# Altium PCB MS20_PCB.PcbDoc
Units mm, origin at the board's own origin, x right, y up, seen from the top; angles counter-clockwise.
Board outline 40 x 100 mm, 2 copper layers (Top Layer, Bottom Layer), stack 1.571 mm thick; 53 components, 34 nets, 160 pads, 38 vias.
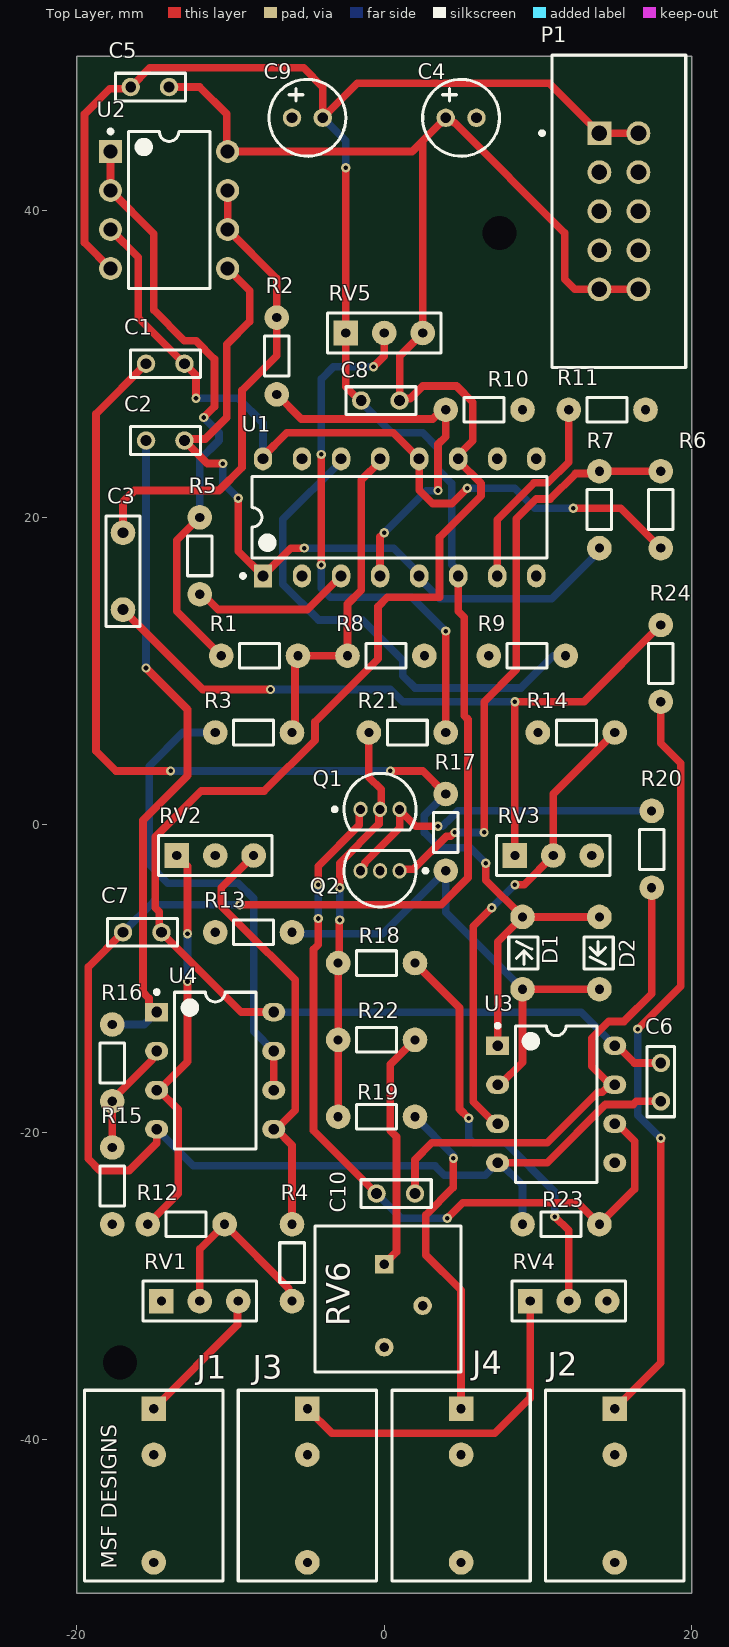
[diagram p0: Top Layer view]
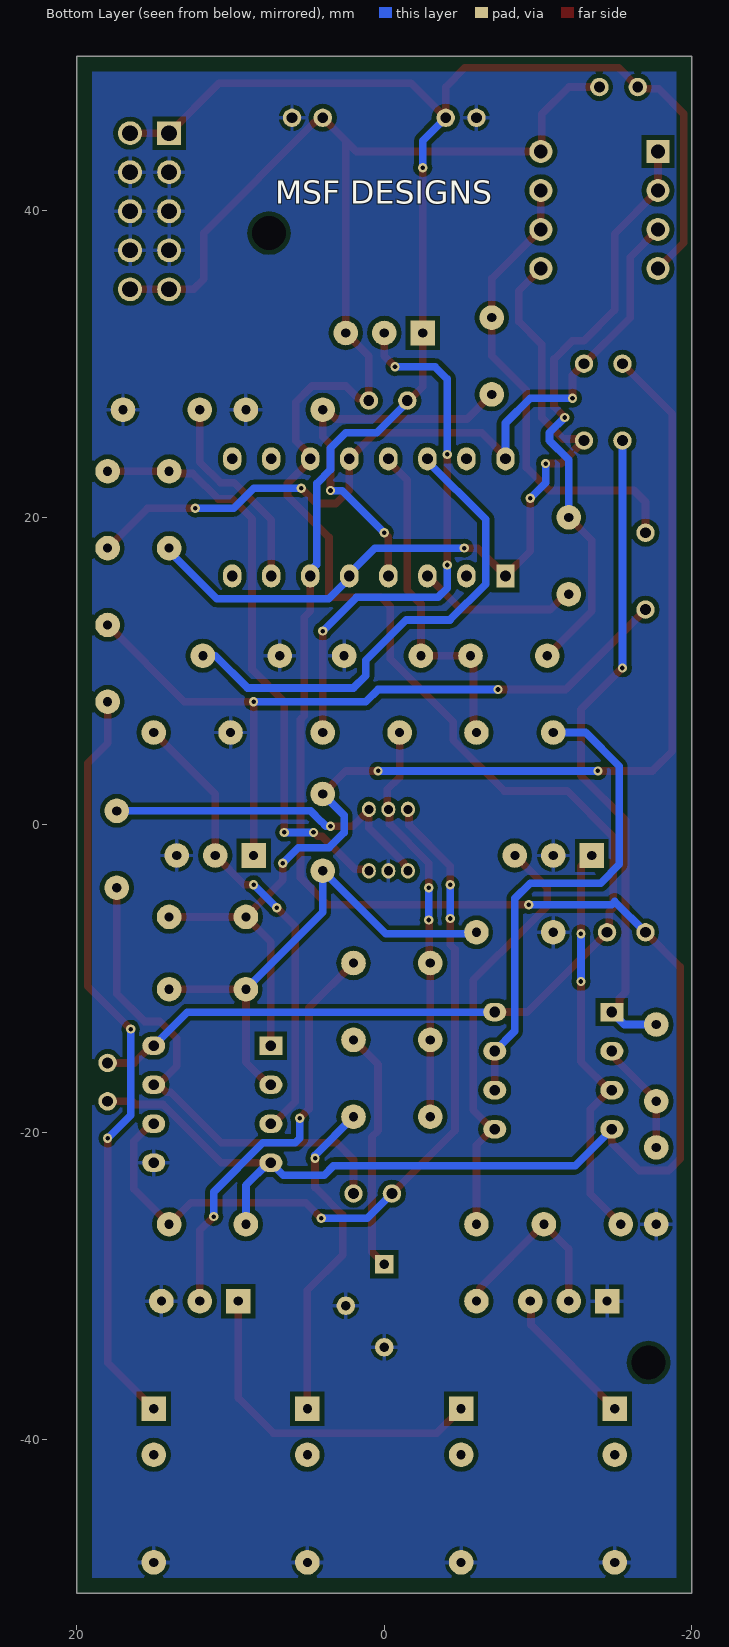
[diagram p1: Bottom Layer view, seen from below]

## Layer stack, top to bottom
Top Solder: solder mask 0.0102, Solder Resist, Dk 3.5
Top Layer: signal copper 0.0356
Dielectric 1: dielectric 1.5, FR-4, Dk 4.8
Bottom Layer: signal copper 0.0356
Bottom Solder: solder mask 0.0102, Solder Resist, Dk 3.5

## Board outline
-20,-50 -20,50 20,50 20,-50

## Design rules (kind name [scope] priority, off if disabled: settings)
Clearance [All] p1: gap=0.3 ignorepadtopadclearanceinfootprint=FALSE
PolygonConnect [All] p1: connectstyle=Relief reliefconductorwidth=0.254 reliefentries=4 polygonreliefangle="90 Angle" airgapwidth=0.254
RoutingVias [All] p1: holewidth=0.3 width=0.6 viastyle="Through Hole" minholewidth=0.3 minwidth=0.6 maxholewidth=0.3 maxwidth=0.6
SilkToSilkClearance [All] p1 off: silktosilkclearance=0.254
SolderMaskExpansion [All] p1: expansion=0.102 istentingtop=FALSE
Width [All] p1: maxlimit=1 minlimit=0.3 preferedwidth=0.5
29 further rules are at their usual default settings.

## Components (designator, comment, footprint, x,y, rotation, side; value= is the part's Value field where it differs from the comment)
C1 "Cap" CERAMIC_CAP -13,30 r180 top value=1n
C2 "Cap" CERAMIC_CAP -13,25 r180 top value=1n
C3 "Cap" FILM_CAPACITOR -17,19 r270 top value=470n
C4 "Cap Pol1" ELECTROLYTIC_CAP 4,46 r0 top value=10u
C5 "Cap" CERAMIC_CAP -14,48 r180 top value=100n
C6 "Cap" CERAMIC_CAP 18,-15.5 r270 top value=100n
C7 "Cap" CERAMIC_CAP -14.5,-7 r180 top value=100n
C8 "Cap" CERAMIC_CAP 1,27.6 r180 top value=100n
C9 "Cap Pol1" ELECTROLYTIC_CAP -6,46 r0 top value=10u
C10 "Cap" CERAMIC_CAP 2,-24 r180 top value=4.7n
D1 "LED0" LED 9,-10.7 r90 top
D2 "LED0" LED 14,-6 r270 top
J1 "Mono Jack" MONO_JACK -15,-38 r0 top
J2 "Mono Jack" MONO_JACK 15,-38 r0 top
J3 "Mono Jack" MONO_JACK -5,-38 r0 top
J4 "Mono Jack" MONO_JACK 5,-38 r0 top
P1 "2X5 HEADER" TECO-1-1634688-0-10_V 15.27,39.92 r270 top
Q1 "BC557C" ONSC-TO-92-3-29-11 -0.27,1 r0 top
Q2 "BC557C" ONSC-TO-92-3-29-11 -0.27,-3 r180 top
R1 "Res1" "RES_AXIAL 5MM" -10.612,11 r0 top value=10K
R2 "Res1" "RES_AXIAL 5MM" -7,33 r270 top value=10K
R3 "Res1" "RES_AXIAL 5MM" -6,6 r180 top value=4.7K
R4 "Res1" "RES_AXIAL 5MM" -6,-31 r90 top value=100K
R5 "Res1" "RES_AXIAL 5MM" -12,15 r90 top value=10K
R6 "Res1" "RES_AXIAL 5MM" 18,23 r270 top value=10K
R7 "Res1" "RES_AXIAL 5MM" 14,23 r270 top value=10K
R8 "Res1" "RES_AXIAL 5MM" 2.612,11 r180 top value=220
R9 "Res1" "RES_AXIAL 5MM" 6.8,11 r0 top value=220
R10 "Res1" "RES_AXIAL 5MM" 9,27 r180 top value=220
R11 "Res1" "RES_AXIAL 5MM" 17,27 r180 top value=220
R12 "Res1" "RES_AXIAL 5MM" -10.388,-26 r180 top value=100K
R13 "Res1" "RES_AXIAL 5MM" -11,-7 r0 top value=4.7K
R14 "Res1" "RES_AXIAL 5MM" 10,6 r0 top value=47K
R15 "Res1" "RES_AXIAL 5MM" -17.7,-26 r90 top value=100K
R16 "Res1" "RES_AXIAL 5MM" -17.7,-18 r90 top value=100K
R17 "Res1" "RES_AXIAL 5MM" 4,-3 r90 top value=10K
R18 "Res1" "RES_AXIAL 5MM" 2,-9 r180 top value=100K
R19 "Res1" "RES_AXIAL 5MM" 2,-19 r180 top value=100K
R20 "Res1" "RES_AXIAL 5MM" 17.4,0.9 r270 top value=4.7K
R21 "Res1" "RES_AXIAL 5MM" 4,6 r180 top value=220K
R22 "Res1" "RES_AXIAL 5MM" 2,-14 r180 top value=1.5K
R23 "Res1" "RES_AXIAL 5MM" 14,-26 r180 top value=470K
R24 "Res1" "RES_AXIAL 5MM" 18,8 r90 top value=1K
RV1 "RPot" RPOT -12,-31 r0 top value=100k
RV2 "RPot" RPOT -11,-2 r0 top value=100k
RV3 "RPot" RPOT 11,-2 r0 top value=100k
RV4 "RPot" RPOT 12,-31 r0 top value=100k
RV5 "RPot" RPOT 0,32 r0 top value=100k
RV6 "RPot SM" TRM_POT 0,-28.6 r0 top
U1 "LM13700N" NFG0016A 1,20 r90 top
U2 "NE5532AP" P0008A#1 -14,40 r0 top
U3 "TL072ACP" P0008A#2 11.19,-18.19 r0 top
U4 "TL072ACP" P0008A#2 -11,-16 r0 top

## Footprints (in the part's own frame and the unit in brackets; to place one, negate y for a bottom-side part, rotate by r counter-clockwise, add the part's x,y. Pads: shape width x height; smd on the part's side, far side on the other; paste and mask are expansions set on the pad)
CERAMIC_CAP [mm]
  round 1.2 hole 0.7: 1(0,0) 2(2.5,0)
  silkscreen extent -1.06,-0.9 3.5,0.9
ELECTROLYTIC_CAP [mm]
  round 1.2 hole 0.7: 1(0,0) 2(2,0)
  silkscreen extent -1.5,-2.5 3.5,2.5
FILM_CAPACITOR [mm]
  round 1.6 / inner round 1.6 / far side round 1.2 hole 0.7: 1(0,0) 2(5,0)
  silkscreen extent -1.1,-1.1 6.1,1.1
LED [mm]
  round 1.6 hole 0.6: 1(0,0) 2(4.7,0)
  silkscreen extent 1.3,-1 3.4,0.9
MONO_JACK [mm]
  rect 1.6x1.6 hole 0.6: 1(0,0)
  round 1.6 hole 0.6: 2(0,-3) 3(0,-10)
  silkscreen extent -4.5,-11.2 4.5,1.2
NFG0016A [mm] "DIP, 16-Leads, Body 19.2x6.6mm, Pitch 2.54mm"
  rect 1.5x1.2 hole 0.7: 1(-3.81,8.89)
  oval 1.5x1.2 hole 0.7: 2(-3.81,6.35) 3(-3.81,3.81) 4(-3.81,1.27) 5(-3.81,-1.27) 6(-3.81,-3.81) 7(-3.81,-6.35) 8(-3.81,-8.89) 9(3.81,-8.89) 10(3.81,-6.35) 11(3.81,-3.81) 12(3.81,-1.27) 13(3.81,1.27) 14(3.81,3.81) 15(3.81,6.35) 16(3.81,8.89)
  silkscreen extent -3.93,-9.6 2.65,10.31, body extent -4.25,-9.52 4.25,9.53, height 4.08
ONSC-TO-92-3-29-11 [mm] "TO, 3-Leads, Body Dia 4.7mm, Pitch 1.27mm"
  oval 0.9x1 hole 0.6: 1(-1.27,0) 2(0,0) 3(1.27,0)
  silkscreen extent -3.07,-1.34 2.35,2.35, body extent -2.35,-1.33 2.36,2.36, height 7.87
P0008A#1 [mm] "DIP, 8-Leads, Body 10.15x6.6mm, Pitch 2.54mm"
  rect 1.5x1.5 hole 0.9: 1(-3.81,3.81)
  round 1.5 hole 0.9: 2(-3.81,1.27) 3(-3.81,-1.27) 4(-3.81,-3.81) 5(3.81,-3.81) 6(3.81,-1.27) 7(3.81,1.27) 8(3.81,3.81)
  silkscreen extent -3.93,-5.1 2.65,5.23, body extent -3.95,-5.07 3.95,5.07, height 5.08
P0008A#2 [mm] "DIP, 8-Leads, Body 10.15x6.6mm, Pitch 2.54mm"
  rect 1.5x1.2 hole 0.7: 1(-3.81,3.81)
  oval 1.5x1.2 hole 0.7: 2(-3.81,1.27) 3(-3.81,-1.27) 4(-3.81,-3.81) 5(3.81,-3.81) 6(3.81,-1.27) 7(3.81,1.27) 8(3.81,3.81)
  silkscreen extent -3.93,-5.1 2.65,5.23, body extent -3.95,-5.07 3.95,5.07, height 5.08
"RES_AXIAL 5MM" [mm]
  round 1.6 hole 0.6: 1(0,0) 2(5,0)
  silkscreen extent 1.2,-0.8 3.8,0.8
RPOT [mm]
  rect 1.6x1.6 hole 0.6: 1(-2.5,0)
  round 1.6 hole 0.6: 2(2.5,0) 3(0,0)
  silkscreen extent -3.7,-1.3 3.7,1.3
TECO-1-1634688-0-10_V [mm] "10-Pin Connector, Body 20.35x8.7mm, Pitch 2.54mm"
  rect 1.55x1.55 hole 1.02: 1(-5.08,-1.27)
  round 1.55 hole 1.02: 2(-5.08,1.27) 3(-2.54,-1.27) 4(-2.54,1.27) 5(0,-1.27) 6(0,1.27) 7(2.54,-1.27) 8(2.54,1.27) 9(5.08,-1.27) 10(5.08,1.27)
  silkscreen extent -10.18,-5.12 10.18,4.35, body extent -10.17,-4.35 10.18,4.65, height 9
TRM_POT [mm]
  round 1.2 hole 0.6: CCW(0,-5.4) W(2.5,-2.7)
  rect 1.2x1.2 hole 0.6: CW(0,0)
  silkscreen extent -4.5,-7 5,2.5

## Part data
C1 C2 C3 C5 C6 C7 C8 C10: "Capacitor", LatestRevisionDate=17-Jul-2002, LatestRevisionNote="Re-released for DXP Platform.", PackageDescription="Radial Cap, Thru-Hole; 2 Leads; 0.3 in Pin Spacing", PackageReference=RAD-0.3, Published=8-Jun-2000, Publisher="Altium Limited"
C4 C9: "Polarized Capacitor (Radial)", LatestRevisionDate=17-Jul-2002, LatestRevisionNote="Re-released for DXP Platform.", PackageDescription="Polarized Capacitor (Radial); 2 Leads", PackageReference=RB7.6-15, Published=8-Jun-2000, Publisher="Altium Limited"
D1 D2: "Typical INFRARED GaAs LED", LatestRevisionDate=08-Jul-2005, LatestRevisionNote="Mech Layer 1 removed.", PackageDescription="LED; 2 Leads", PackageReference=LED-0, Published=8-Jun-2000, Publisher="Altium Limited"
J1 J2 J3 J4: library part 4832.2211, "Phone Connectors Audio Socket 3.5MM 2P SCR", Case/Package=Metal, Current Rating=500mA, Manufacturer=Schurter, Max Operating Temperature=70°C, Max Voltage Rating (AC)=30V, Min Operating Temperature=-20°C, Package Quantity=500, Supplier Part Number 1=486-3418-ND, Body Material=Metal, Category="Audio / Video Connectors", ComponentLink1Description=https://datasheet.ciiva.com/25289/1580985-25289573.pdf?src-supplier=Newark, ComponentLink1URL=https://datasheet.ciiva.com/25289/1580985-25289573.pdf?src-supplier=Newark, ComponentLink2Description=https://datasheet.ciiva.com/12540/typ-4832-2211-58787-12540719.pdf?src-supplier=Mouser, ComponentLink2URL=https://datasheet.ciiva.com/12540/typ-4832-2211-58787-12540719.pdf?src-supplier=Mouser, ComponentLink3Description=https://datasheet.ciiva.com/1086/1580985-1086284.pdf?src-supplier=Element14, ComponentLink3URL=https://datasheet.ciiva.com/1086/1580985-1086284.pdf?src-supplier=Element14, Contact Plating=Silver, Depth=9mm, Diameter=3.5mm, Gender=Female, Length=10.5mm, Manufacturer Part Number=4832.2211, Material=Plastic, Max Current Rating=500mA, Mount="Through Hole,Panel", Number of Contacts=2, Number of Ports=1, Number of Terminals=3, Orientation=Straight, Packaging=Bulk, Pricing 1="1=1.50000, 50=1.38500, 100=1.13400, 500=0.94200, 1000=0.93840 (USD)", REACH SVHC="No SVHC", RoHS=Yes, Shielding=Shielded, Stock 1=363, Supplier 1=Digi-Key, Termination=Solder, Weight=0.077603oz
P1: library part CMP-2000-05854-1, "Male Header, Pitch 2.54 mm, 2 x 5 Postion, Height 9.15 mm, Tail Length 3.2 mm, -40 to 105 degC, RoHS, Bulk", Manufacturer="TE Connectivity", Package Description="10-Pin Connector, Body 20.35 x 8.7 mm, Pitch 2.54 mm", Package Reference=1-1634688-0, Package Version="Rev. C2, 02/2011", Contact Material=Brass, Contact Plating=GoldPlatedContacts, Contact Termination Type=ThroughHole, Datasheet URL=https://datasheet.ciiva.com/6831/eng-cd-1634688-c2-6831201.pdf, Datasheet Version="Rev. C2, 02/2011", Gender=Header, Manufacturer URL=http://www.te.com/, Mounting Technology=ThroughHole, No. of Contacts=10Contacts, No. of Positions=10, No. of Rows=2, Orientation=Straight, Package URL=https://datasheet.ciiva.com/6831/eng-cd-1634688-c2-6831201.pdf, PartNumber=1-1634688-0, Pitch=2.54mm, Pitch Spacing=2.54mm, Product Range=-, SVHC=ToBeAdvised
Q1 Q2: library part CMP-1048-01449-1, "Amplifier Transistor, PNP Silicon, 3-Pin TO-92, Bulk Box", Manufacturer="On Semiconductor", ComponentLink1Description="Manufacturer URL", ComponentLink1URL=http://www.onsemi.com/, ComponentLink2Description=Datasheet, ComponentLink2URL=http://www.onsemi.com/pub_link/Collateral/BC556B-D.PDF, ComponentLink3Description="Package Specification", ComponentLink3URL=http://www.onsemi.cn/pub_link/Collateral/2N6426-D.PDF, DatasheetVersion="Rev. 3", IC Continuous (A)=-0.1, Mounting Technology="Through Hole", PackageDescription="3-Pin Transistor Outline, Body 4.825 x 3.685 mm, Pitch 1.27 mm", PackageReference=TO-92-3-29-11_AM_SL, PackageVersion="Rev. AM", Packing="Bulk Box", PartNumber=BC557C, Polarity=PNP, RoHS=FALSE
R1 R2 R3 R4 R5 R6 R7 R8 R9 R10 R11 R12 R13 R14 R15 R16 R17 R18 R19 R20 R21 R22 R23 R24: "Resistor", LatestRevisionDate=17-Jul-2002, LatestRevisionNote="Re-released for DXP Platform.", PackageDescription="Axial Device, Thru-Hole; 2 Leads; 0.3 in Pin Spacing", PackageReference=AXIAL-0.3, Published=8-Jun-2000, Publisher="Altium Limited"
RV1 RV2 RV3 RV4 RV5: "Potentiometer", LatestRevisionDate=17-Jul-2002, LatestRevisionNote="Re-released for DXP Platform.", PackageDescription="Variable Resistor, Thru-Hole; 3 Leads", PackageReference=VR5, Published=8-Jun-2000, Publisher="Altium Limited", Set Position=0.5, Sim Note="Enter the Resistance value and the set point into parameter fields."
RV6: "Square Trimming Potentiometer", ComponentLink1Description="Manufacturer Link", ComponentLink1URL=http://bourns.com/2/search.html, DatasheetVersion=Oct-2003, PackageDescription="Square Trimming Potentiometer", PackageReference=POT4MM-2, Published=17-Dec-2003, Publisher="Altium Limited"
U1: library part CMP-0055-00179-3, "Dual Operational Transconductance Amplifier with Linearizing Diodes and Buffers, 16-pin MDIP", Manufacturer="Texas Instruments", Package Reference=NFG0016A, PackageTopMarking=NSUZXYYTTE#*LM13700N, PowerWise=N, Code_JEDEC=MS-001-BB, ComponentLink1Description="Datasheet URL", ComponentLink1URL=http://www.ti.com/general/docs/lit/getliterature.tsp?genericPartNumber=LM13700&fileType=pdf, CompType=Amplifiers, PackageDescription="MDIP, .750 x .250 x .130in, 16 Lead, .100in Pitch", PinCount=16, RoHS=N
U2: library part CMP-0017-00921-2, "Dual Low-Noise Operational Amplifier, 10 to 30 V, 0 to 70 degC, 8-pin DIP (P8), Pb-Free (RoHS)", Manufacturer="Texas Instruments", Total Supply Voltage(Max)(+5V is 5, +/-5V is 10)=30, Total Supply Voltage(Min)(+5V is 5, +/-5V is 10)=10, CMRR(Min)(dB)=70, Code_JEDEC=MS-001, ComponentLink1Description="Manufacturer URL", ComponentLink1URL=http://www.ti.com/, ComponentLink2Description=Datasheet, ComponentLink2URL=http://www.ti.com/lit/ds/symlink/ne5532a.pdf, ComponentLink3Description="Package Specification", ComponentLink3URL=http://www.ti.com/litv/pdf/mpdi001b, DatasheetVersion=SLOS075I, Eco-Plan="Pb-Free (RoHS)", GBW(Typ)(MHz)=10, IIB(Max)(pA)=800000, Iq per channel(Max)(mA)=4, Mounting Technology="Through Hole", Number of Channels=2, PackageDescription="8-Pin Plastic In-Line, Body 9.59 x 6.35 mm, Pitch 2.54 mm", PackageReference=P0008A, PackageVersion="4040082/E, 04/2010", PartNumber=NE5532AP, Slew Rate(Typ)(V/us)=9, Sub Family="General Purpose Amplifier, High Supply Voltage Amplifier (>=30V), Low Noise Amp (<=10nV/rtHz)", Vio (25C)(Max)(mV)=4, Vn at 1kHz(Typ)(nV/rtHz)=5
U3 U4: library part CMP-0017-00929-2, "Low-Noise JFET-Input Operational Amplifier, 7 to 36 V, 0 to 70 degC, 8-pin DIP (P8), Pb-Free (RoHS)", Manufacturer="Texas Instruments", Rating=Catalog, Total Supply Voltage(Max)(+5V is 5, +/-5V is 10)=36, Total Supply Voltage(Min)(+5V is 5, +/-5V is 10)=7, CMRR(Min)(dB)=75, Code_JEDEC=MS-001, ComponentLink1Description="Manufacturer URL", ComponentLink1URL=http://www.ti.com/, ComponentLink2Description=Datasheet, ComponentLink2URL=http://www.ti.com/lit/ds/symlink/tl072a.pdf, ComponentLink3Description="Package Specification", ComponentLink3URL=http://www.ti.com/litv/pdf/mpdi001b, DatasheetVersion=SLOS080J, Eco-Plan="Pb-Free (RoHS)", GBW(Typ)(MHz)=3, IIB(Max)(pA)=200, Iq per channel(Max)(mA)=2.5, Mounting Technology="Through Hole", Number of Channels=2, Offset Drift(Typ)(uV/C)=18, PackageDescription="8-Pin Plastic In-Line, Body 9.59 x 6.35 mm, Pitch 2.54 mm", PackageReference=P0008A, PackageVersion="4040082/E, 04/2010", PartNumber=TL072ACP, Slew Rate(Typ)(V/us)=13, Sub Family="General Purpose Amplifier, High Supply Voltage Amplifier (>=30V)", Vio (25C)(Max)(mV)=6, Vn at 1kHz(Typ)(nV/rtHz)=18

## Free pads (board coordinates)
  oct 0x0 hole 2.2 unplated: 2(-17.2,-35) 3(7.5,38.5)

## Via types
v1: diameter 0.6, hole 0.3, Top Layer to Bottom Layer, 38 vias

## Nets (pads, with @x,y where several pads share a name; then routed paths per layer and width w, separated by ;. In a path a pad name is that pad's centre, name@x,y a point inside that pad or via, vN(x,y) a via of type N, cw(c..) or ccw(c..) an arc to the next point about the centre after c; other vN are vias at no path point)
+12: C4.1 C5.1 C6.1 C7.1 C8.1 P1.9 P1.10 RV5.2 U1.11 U2.8 U3.8 U4.8 | length 148.9
  Top Layer w0.5: C5.1 -12,48 -10.25,46.25 -10.25,43.87 U2.8 1.81,43.81 2.5,44.5 ; U4.8 -9.31,-12.19 C7.1 -14.634,-6.866 -14.634,-5.666 -14.9,-5.4 -14.9,-0.8 -11.9,2.2 -7.8,2.2 -4.5,5.5 -4.5,6.7 -0.4,10.8 -0.4,14.2 0.2,14.8 3.6,14.8 3.6,18.7 6.3,21.4 6.3,22.202 4.81,23.692 U1.11 4.81,24.051 5.75,24.991 5.75,27.5 4.7,28.55 2.5,28.55 1.684,27.734 1.134,27.734 C8.1 1,30.5 RV5.2 2.5,44.5 ; U3.8 15.149,-14.38 16.269,-15.5 C6.1 ; P1.10 P1.9 12.41,34.84 11.75,35.5 11.75,38.5 4.58,45.67 4.519,45.67 4.189,46 C4.1 2.5,44.5
  Bottom Layer w0.5: U4.8 -7.18,-12.2 12.82,-12.2 U3.8
-12: C5.2 C6.2 C7.2 C8.2 C9.2 P1.1 P1.2 R23.2 RV5.1 U1.6 U2.4 U3.4 U4.4 | length 194.4
  Top Layer w0.5: U2.4 -19.5,37.88 -19.5,46.25 -17.85,47.9 -16.6,47.9 C5.2 -15.25,49.25 -5.25,49.25 -4,48 C9.2 -1.75,48.25 10.75,48.25 P1.1 P1.2 ; C7.2 -19.262,-9.262 -19.262,-21.738 -18.5,-22.5 -16.6,-22.5 -14.81,-20.71 U4.4 ; v1(-9.4,-5.2) 3.709,-5.2 5.45,-3.459 5.45,6.85 5.2,7.1 5.2,13.5 4.81,13.89 U1.6 ; v1(-2.5,42.75) RV5.1 -2.5,28.5 -1.6,27.6 C8.2 ; U3.4 10.6,-22 14.4,-18.2 16.2,-18.2 16.4,-18 C6.2
  Bottom Layer w0.5: C7.2 -15,-5 -14.8,-5.2 v1(-9.4,-5.2) ; U4.4 -12.42,-22.2 3.3,-22.2 3.9,-22.8 6.58,-22.8 U3.4 7.53,-22 9,-23.47 R23.2 ; C9.2 -2.5,44.5 v1(-2.5,42.75) ; C8.2 -1.5,27.5 0.5,25.5 2.5,25.5 3.5,24.5 3.5,23.1 4.4,22.2 4.4,16.939 4.81,16.529 U1.6
GND: C4.2 C9.1 J1.3 J2.3 J3.3 J4.3 P1.3 P1.4 P1.5 P1.6 P1.7 P1.8 Q2.2 R8.1 R9.1 R10.1 R11.1 R13.1 R14.1 R15.1 RV1.1 RV2.3 RV3.2 RV4.2 RV6.CCW RV6.W U3.5
NetC1_1: C1.1 R6.2 U1.12 U1.16 U2.3 | length 52.4
  Top Layer w0.5: U2.3 -16,36.92 -16,33 C1.1 -12.25,29.25 v1(-12.25,27.75) ; U1.16 -7.89,23.96 -6.35,25.5 0.58,25.5 U1.12 2.27,21.778 3.148,20.9 4.4,20.9 v1(5.4,21.9) ; v1(12.3,20.6) 15.4,20.6 R6.2
  Bottom Layer w0.5: v1(-12.25,27.75) -9.5,27.75 -7.89,26.14 U1.16 ; v1(5.4,21.9) 8.5,21.9 9.8,20.6 v1(12.3,20.6)
NetC1_2: C1.2 D1.2 D2.1 R17.2 U3.1 | length 76.9
  Top Layer w0.5: C1.2 -18.75,26.75 -18.75,4.793 -17.459,3.502 v1(-13.902,3.502) v1@-13.9,3.5 ; v1@0.4,3.5 v1(0.402,3.502) 2.498,3.502 R17.2 ; v1(6.6,-2.5) 6.6,-3.6 D1.2 ; U3.1 7.38,-7.62 D1.2 ; D2.1 D1.2
  Bottom Layer w0.5: v1(-13.902,3.502) v1(0.402,3.502) ; R17.2 2.6,0.6 2.6,-0.5 3.6,-1.5 5.6,-1.5 v1(6.6,-2.5)
NetC2_1: C2.1 R7.2 U1.1 U1.5 U2.5 | length 51.5
  Top Layer w0.5: v1(-10.5,23.5) -11.5,23.5 C2.1 -12.9,25.1 -11.65,25.1 -10.25,26.5 -10.25,31.25 -8.75,32.75 -8.75,34.75 U2.5 ; v1(-9.5,21.25) -9.5,17.8 U1.1 -6.08,18 v1(-5.2,18)
  Bottom Layer w0.5: v1(-10.5,23.5) -10.5,22.25 v1(-9.5,21.25) ; v1(-5.2,18) 0.61,18 2.27,16.34 U1.5 2.27,16.04 3.61,14.7 10.9,14.7 14,17.8 R7.2
NetC2_2: C2.2 R16.2 U4.1 | length 43.1
  Top Layer w0.5: v1(-15.5,10.2) -12.8,7.5 -12.8,3.2 -15.7,0.3 -15.7,-10.9 -15.31,-11.29 -15.31,-11.69 U4.1
  Bottom Layer w0.5: R16.2 -15.62,-13 U4.1 ; v1(-15.5,10.2) C2.2
NetC3_1: C3.1 R2.1 U2.6 U2.7 | length 31
  Top Layer w0.5: C3.1 -17,21 -16.25,21.75 -10.75,21.75 -9.25,23.25 -9.25,28.275 -7,30.525 -7,35.54 U2.6 U2.7
NetC3_2: C3.2 R24.2 RV3.1 | length 49.8
  Top Layer w0.5: C3.2 -11.8,8.8 v1(-7.4,8.8) ; RV3.1 8.2,-1.7 8.5,-1.4 v1(8.5,8) 13,8 R24.2
  Bottom Layer w0.5: v1(-7.4,8.8) 0.4,8.8 1.2,8 v1(8.5,8)
NetC10_1: C10.1 R20.2 U3.7 | length 32.7
  Top Layer w0.5: C10.1 2,-21.8 3.1,-20.7 10.6,-20.7 13.9,-17.4 14.181,-17.4 14.661,-16.92 U3.7@14.713,-16.92 ; U3.7 U3.7@14.713,-16.92 ; R20.2 17.4,-11 15.6,-12.8 14.6,-12.8 13.5,-13.9 13.5,-15.707 U3.7@14.713,-16.92
NetC10_2: C10.2 Q1.1 R23.1 U3.6 | length 52.2
  Top Layer w0.5: v1(-4.3,-6.1) -4.3,-7.8 -4.6,-8.1 -4.6,-19.9 C10.2 ; v1(-4.3,-3.9) -4.3,-2.7 -1.617,-0.017 -1.617,0.923 Q1.1 ; v1(4.1,-25.6) 5.1,-24.6 12.6,-24.6 R23.1 16.3,-23.7 16.3,-20.6 15.16,-19.46 U3.6
  Bottom Layer w0.5: v1(-4.3,-6.1) v1(-4.3,-3.9) ; C10.2 1.1,-25.6 v1(4.1,-25.6)
NetD1_1: D1.1 D2.2 R13.2 R17.1 U3.2 | length 33.5
  Top Layer w0.5: U3.2 7.53,-16.92 9,-15.45 D1.1 D2.2
  Bottom Layer w0.5: R13.2 -5.9,-7.1 -0.1,-7.1 R17.1 4,-5.7 D1.1
NetJ1_1: J1.1 RV1.2 | length 9.3
  Top Layer w0.5: J1.1 -9.55,-32.55 -9.55,-31.05 RV1.2
NetJ2_1: J2.1 R24.1 | length 49.6
  Top Layer w0.5: J2.1 18,-35 v1(18,-20.4) ; v1(16.5,-13.3) 19.3,-10.5 19.3,4 18,5.3 R24.1
  Bottom Layer w0.5: v1(16.5,-13.3) 16.5,-18.9 v1(18,-20.4)
NetJ3_1: J3.1 RV4.1 | length 22.4
  Top Layer w0.5: J3.1 -3.4,-39.6 7.2,-39.6 9.5,-37.3 RV4.1
NetJ4_1: J4.1 R19.1 | length 21.7
  Top Layer w0.5: v1(4.5,-21.7) 4.5,-23.6 2.7,-25.4 2.7,-28 5,-30.3 J4.1
  Bottom Layer w0.5: R19.1 4.5,-21.5 v1(4.5,-21.7)
NetQ1_2: Q1.2 R18.2 R19.2 R21.2 R22.2 | length 26.5
  Top Layer w0.5: R19.2 R22.2 R18.2 -2.919,-8.919 -2.919,-6.219 v1(-2.9,-6.2) ; v1(-2.9,-4.1) -2.9,-2.5 -0.347,0.053 -0.347,0.923 Q1.2 -0.2,1.07 -0.2,2.3 -1,3.1 R21.2
  Bottom Layer w0.5: v1(-2.9,-6.2) v1(-2.9,-4.1)
NetQ1_3: Q1.3 Q2.3 R20.1 | length 22
  Top Layer w0.5: Q2.3 -1.54,-2.842 -1.27,-2.572 -1.27,-2.47 1,-0.2 Q1.3@1,0.95 ; Q1.3 Q1.3@1,0.95 ; v1(3.5,-0.1) 2.05,-0.1 Q1.3@1,0.95
  Bottom Layer w0.5: v1@3.794,-0.081 4.075,0.2 4.1,0.2 4.8,0.9 R20.1
NetQ2_1: Q2.1 R6.1 R7.1 | length 38.5
  Top Layer w0.5: Q2.1 1.1,-2.9 1.9,-2.9 4.05,-0.75 4.323,-0.75 4.573,-0.5 v1(4.6,-0.5) ; v1(6.5,-0.5) 6.5,8 8.6,10.1 8.6,19.9 9.9,21.2 10.8,21.2 12.45,22.85 13.85,22.85 R7.1 R6.1
  Bottom Layer w0.5: v1(4.6,-0.5) v1(6.5,-0.5)
NetR1_1: R1.1 R5.2 U2.1 U2.2 | length 39.1
  Top Layer w0.5: U2.1 U2.2 -15,38.46 -15,33.5 -13,31.5 -12.25,31.5 -11.05,30.3 -11.05,27.2 -11.419,26.831 v1(-11.75,26.5) ; R5.2 -13.5,18.5 -13.5,13.888 R1.1
  Bottom Layer w0.5: R5.2 -12,23.75 -10.75,25 -10.75,25.5 v1(-11.75,26.5)
NetR1_2: R1.2 R3.1 R8.2 U1.13 | length 22.1
  Top Layer w0.5: R3.1 -5.806,6.194 -5.806,10.806 R1.2 R8.2 -2.388,14.362 -1.5,15.25 -1.5,22.43 -0.27,23.66 U1.13
NetR2_2: R2.2 R10.2 U1.4 | length 24.9
  Top Layer w0.5: R2.2 -5.4,26.4 3.157,26.4 3.757,27 R10.2 4,25.25 3.5,24.75 v1(3.5,21.75) ; U1.4 -0.27,18.73 v1(0,19)
  Bottom Layer w0.5: v1(0,19) 2.731,21.731 3.481,21.731 v1(3.5,21.75)
NetR3_2: R3.2 U4.6 U4.7 | length 32.3
  Top Layer w0.5: U4.6 U4.7
  Bottom Layer w0.5: R3.2 -13.1,6 -15.3,3.8 -15.3,-2.578 -14.078,-3.8 -9.5,-3.8 -8.5,-4.8 -8.5,-13.42 U4.7
NetR4_1: R4.1 R12.1 RV1.3 | length 12.5
  Top Layer w0.5: RV1.3 -12,-27.612 R12.1 -6.21,-30.178 -6.21,-30.79 R4.1
NetR4_2: R4.2 RV2.2 U4.5 | length 28
  Top Layer w0.5: RV2.2 -10.6,-4.1 -10.6,-5.3 -9.2,-6.7 -5.8,-10.1 -5.8,-18.57 U4.5@-7.04,-19.81 ; U4.5 U4.5@-7.04,-19.81 ; R4.2 -6,-20.85 U4.5@-7.04,-19.81
NetR5_1: R5.1 U1.3 | length 10.5
  Top Layer w0.5: R5.1 -11.808,15 -10.808,14 -5,14 U1.3
NetR9_2: R9.2 U1.14 | length 32.4
  Bottom Layer w0.5: U1.14 -2.81,23.66 -6.6,19.87 -6.6,15.65 -4.275,13.325 -1.425,13.325 1.2,10.7 1.2,9.7 2,8.9 8.9,8.9 11,11 R9.2
NetR11_2: R11.2 U1.7 | length 13.3
  Top Layer w0.5: U1.7 7.35,19.85 9.75,22.25 10.65,22.25 12,23.6 R11.2
NetR12_2: R12.2 RV2.1 U4.3 | length 26.6
  Top Layer w0.5: R12.2 -13.4,-24.012 -13.4,-18.53 U4.3@-14.66,-17.27 ; U4.3 U4.3@-14.66,-17.27 ; RV2.1 -12.8,-2.7 v1(-12.8,-7.1) ; v1(-12.8,-10.2) -12.8,-15.41 U4.3@-14.66,-17.27
  Bottom Layer w0.5: v1(-12.8,-10.2) v1(-12.8,-7.1)
NetR14_2: R14.2 RV3.3 U3.3 | length 30.4
  Top Layer w0.5: v1(7,-5.4) 5.8,-6.6 5.8,-18.03 7.23,-19.46 U3.3 ; v1(8.5,-3.9) 9.1,-3.9 RV3.3 11,2 R14.2
  Bottom Layer w0.5: v1(7,-5.4) v1(8.5,-3.9)
NetR15_2: R15.2 R16.1 U4.2 | length 7.5
  Top Layer w0.5: R15.2 R16.1 -17.7,-17.9 -15.094,-15.294 -15.094,-15.014 U4.2
NetR18_1: R18.1 RV4.3 | length 27.4
  Top Layer w0.5: R18.1 4.9,-11.9 4.9,-18.5 v1(5.5,-19.1) ; v1(11.1,-25.5) 12,-26.4 RV4.3
  Bottom Layer w0.5: v1(5.5,-19.1) 5.5,-20.407 5.793,-20.7 7.9,-20.7 11.1,-23.9 v1(11.1,-25.5)
NetR21_1: R21.1 RV5.3 | length 35.7
  Top Layer w0.5: v1(-4.1,16.9) v1(-4.1,24.1) ; v1(-0.7,29.8) 0,30.5 RV5.3 ; R21.1 v1(4,12.6)
  Bottom Layer w0.5: v1(-4.1,16.9) -4.1,15.4 -3.5,14.8 1.8,14.8 v1(4,12.6) ; v1(-4.1,24.1) -4.1,29 -3.3,29.8 v1(-0.7,29.8)
NetR22_1: R22.1 RV6.CW | length 15.8
  Top Layer w0.5: RV6.CW 0.8,-27.8 0.8,-20.3 0.4,-19.9 0.4,-15.6 R22.1
pads on no net: J1.2 J2.2 J3.2 J4.2 U1.2 U1.8 U1.9 U1.10 U1.15

## Polygon pours and split planes (outlines as drawn)
GND on Bottom Layer "GND_L02_P000" (solid, remove dead copper, pour order 0): -19,-49 19,-49 19,49 -19,49

## Silkscreen, mask and mechanical layers (free items; w line width, h text height)
Top Overlay:
  text "MSF DESIGNS" at -17.4,-48.4 h1 r90
Bottom Overlay:
  text "MSF DESIGNS" at 7.1,40.4 h1.5
Mechanical 1:
  the board outline again, w0.254